# Altium PCB CALTRANS Signal Interface.PcbDoc
Units mil, origin at the board's own origin, x right, y up, seen from the top; angles counter-clockwise.
Board outline 2130 x 2405 mil, 4 copper layers (Components, GND, PWR, Signals), stack 23.756 mil thick; 39 components, 34 nets, 163 pads, 71 vias.
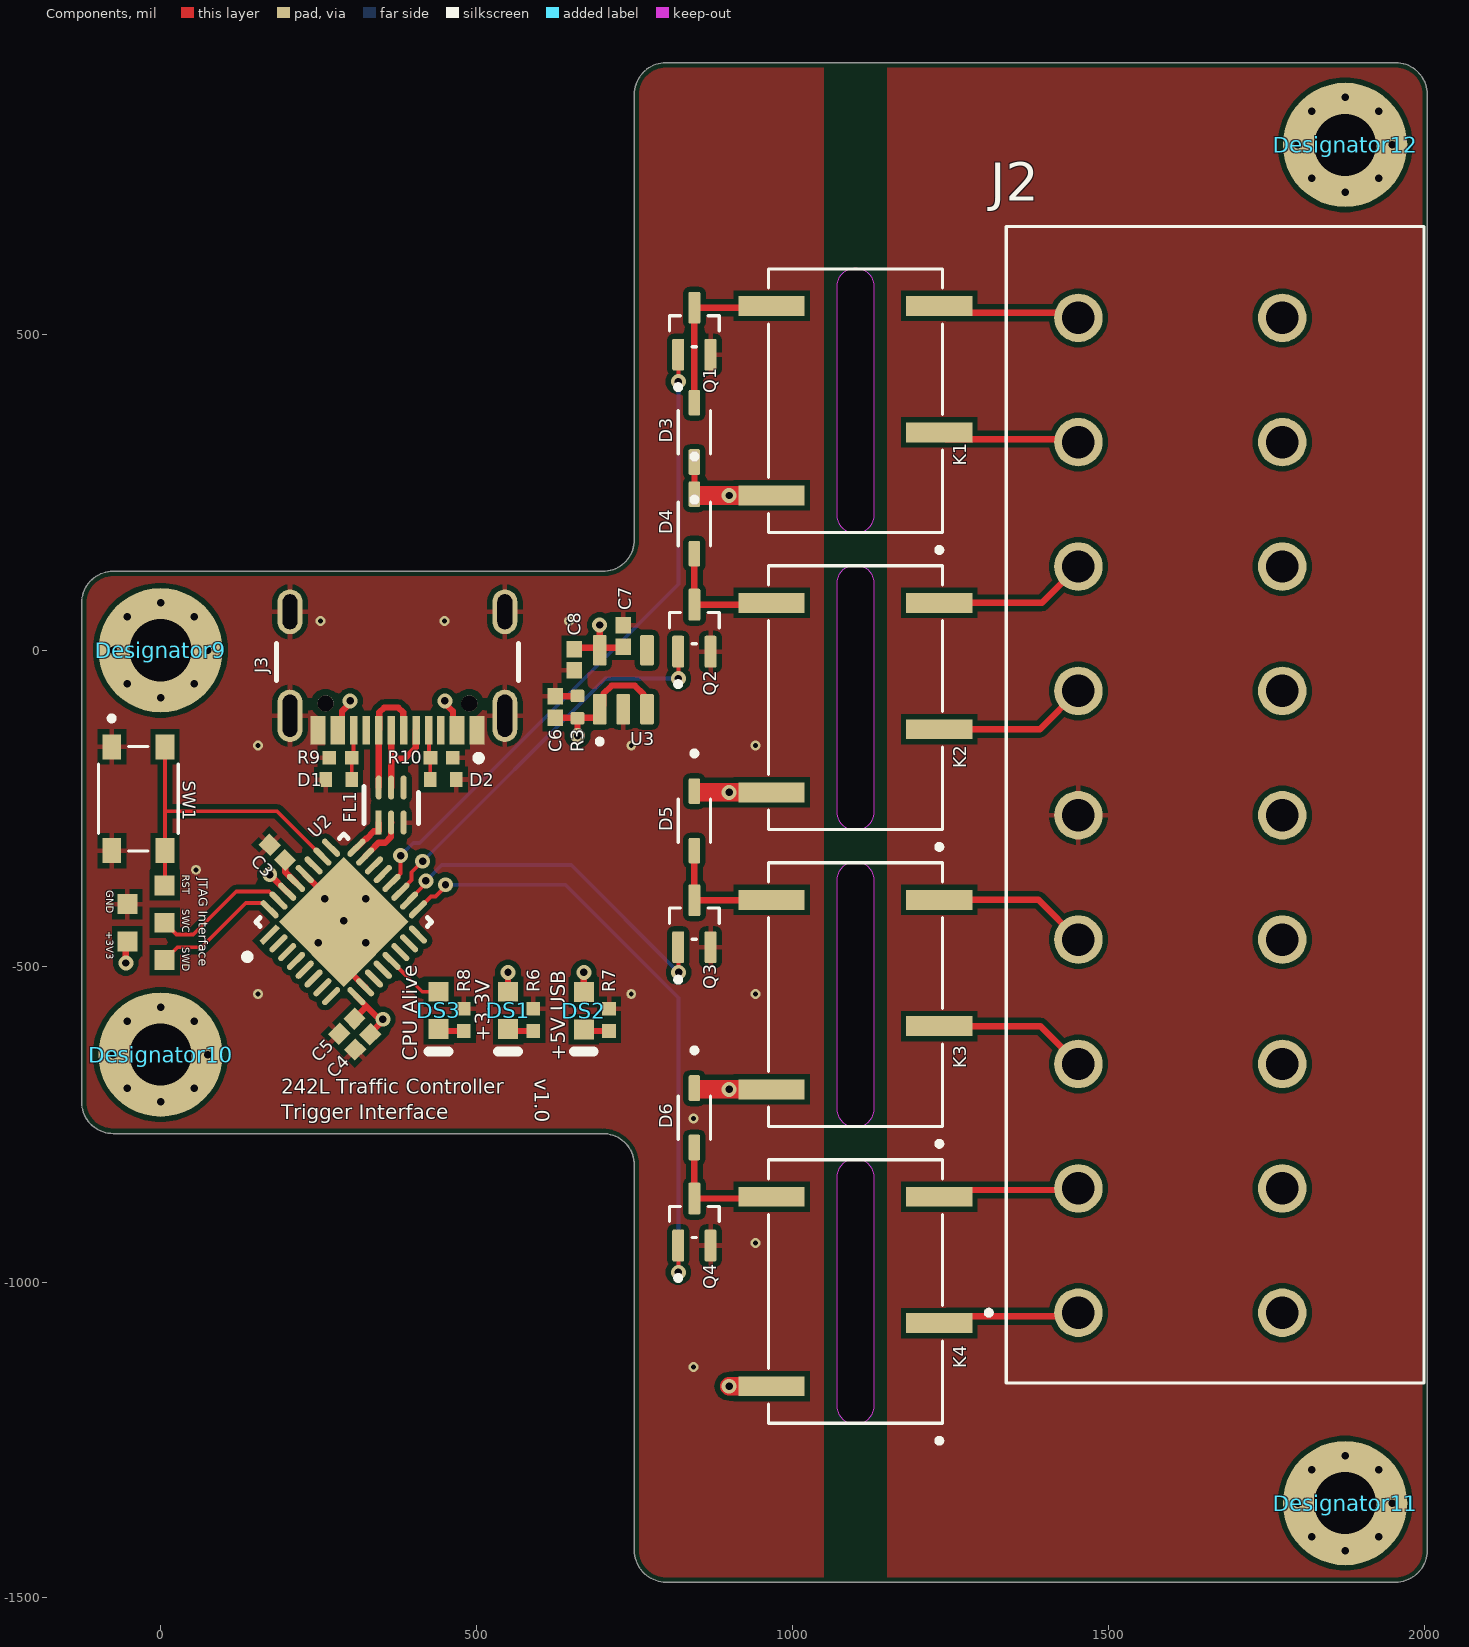
[diagram p0: Components view]
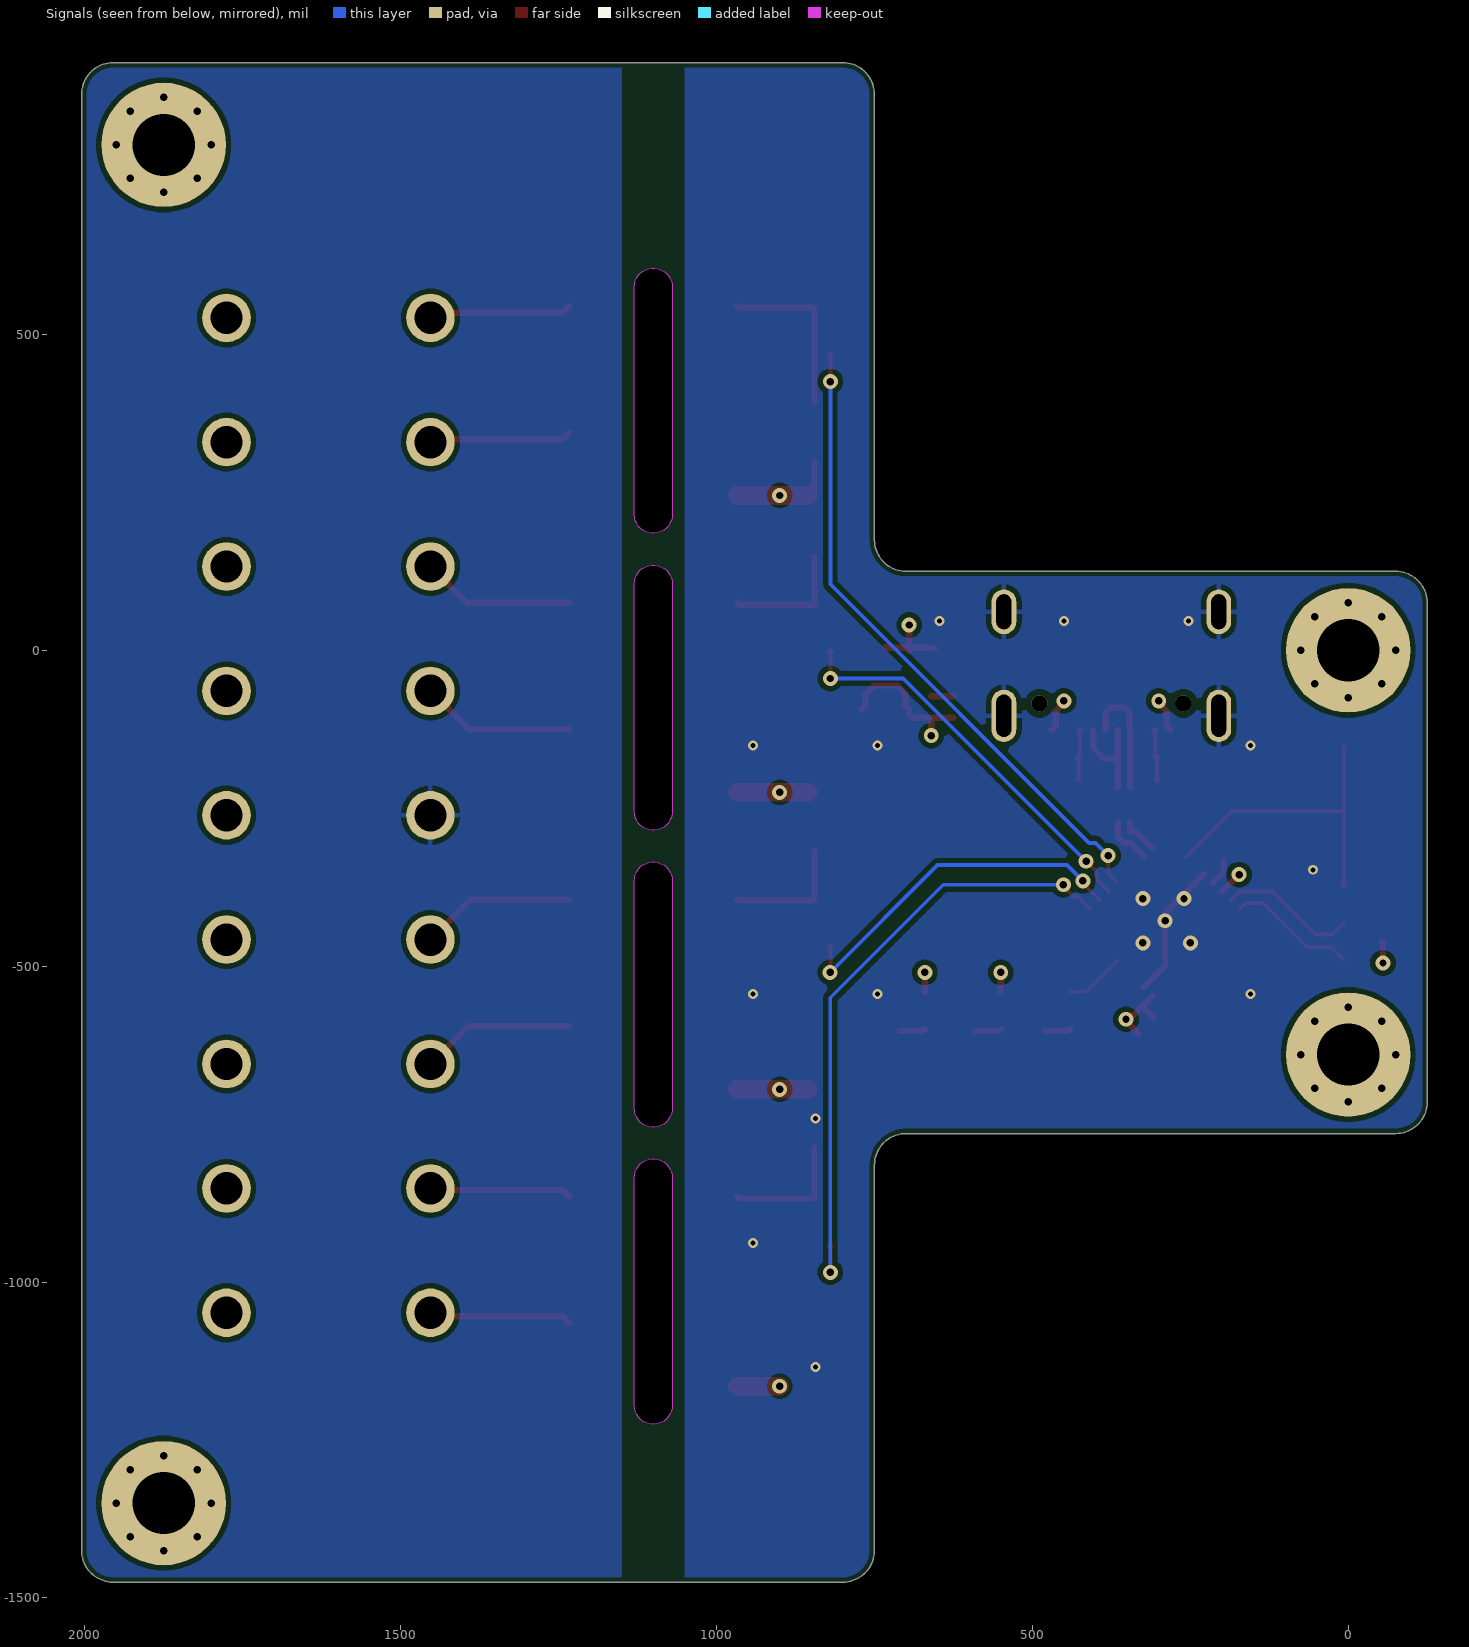
[diagram p1: Signals view, seen from below]
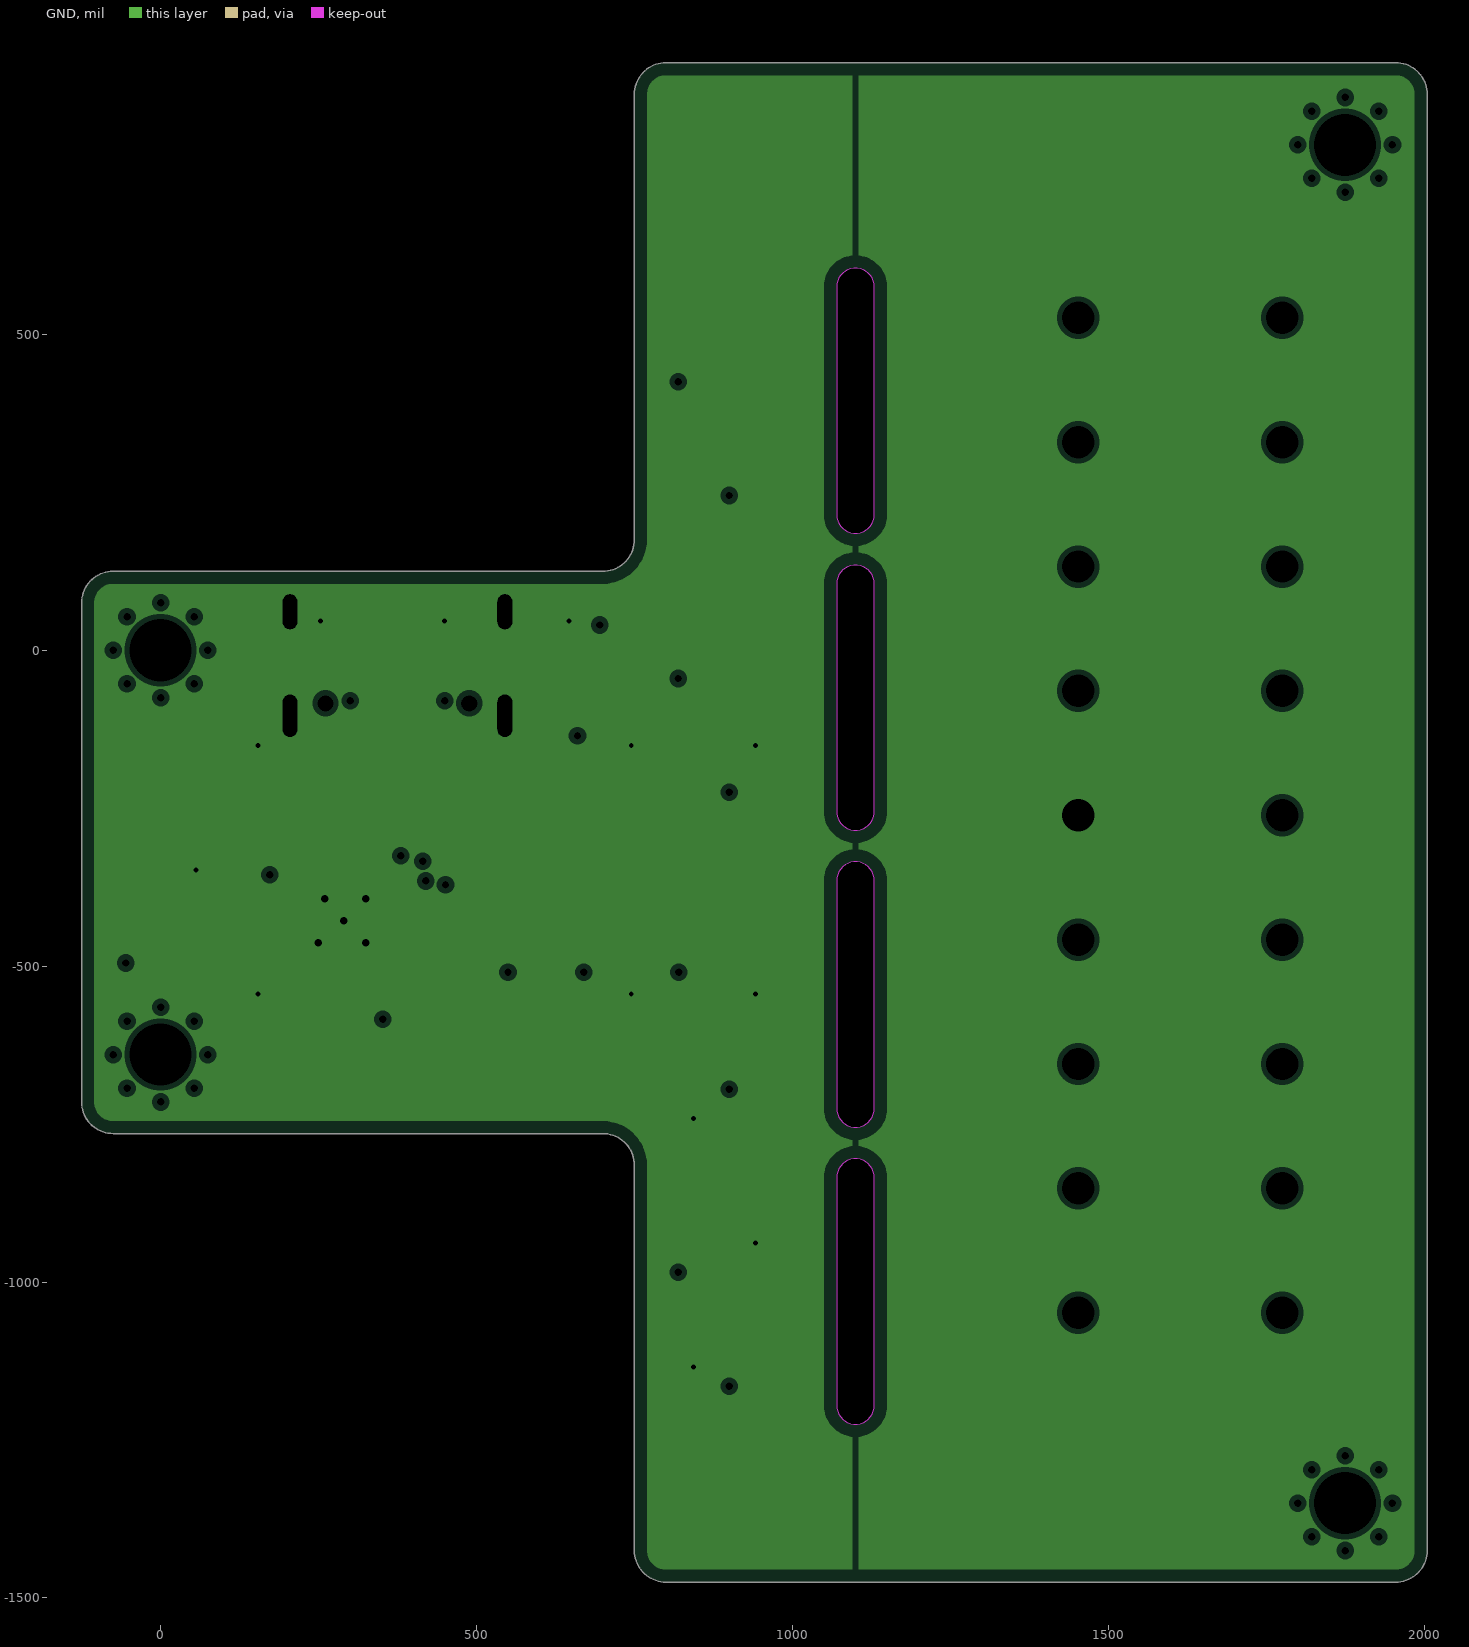
[diagram p2: GND, clearances drawn from the general rule]
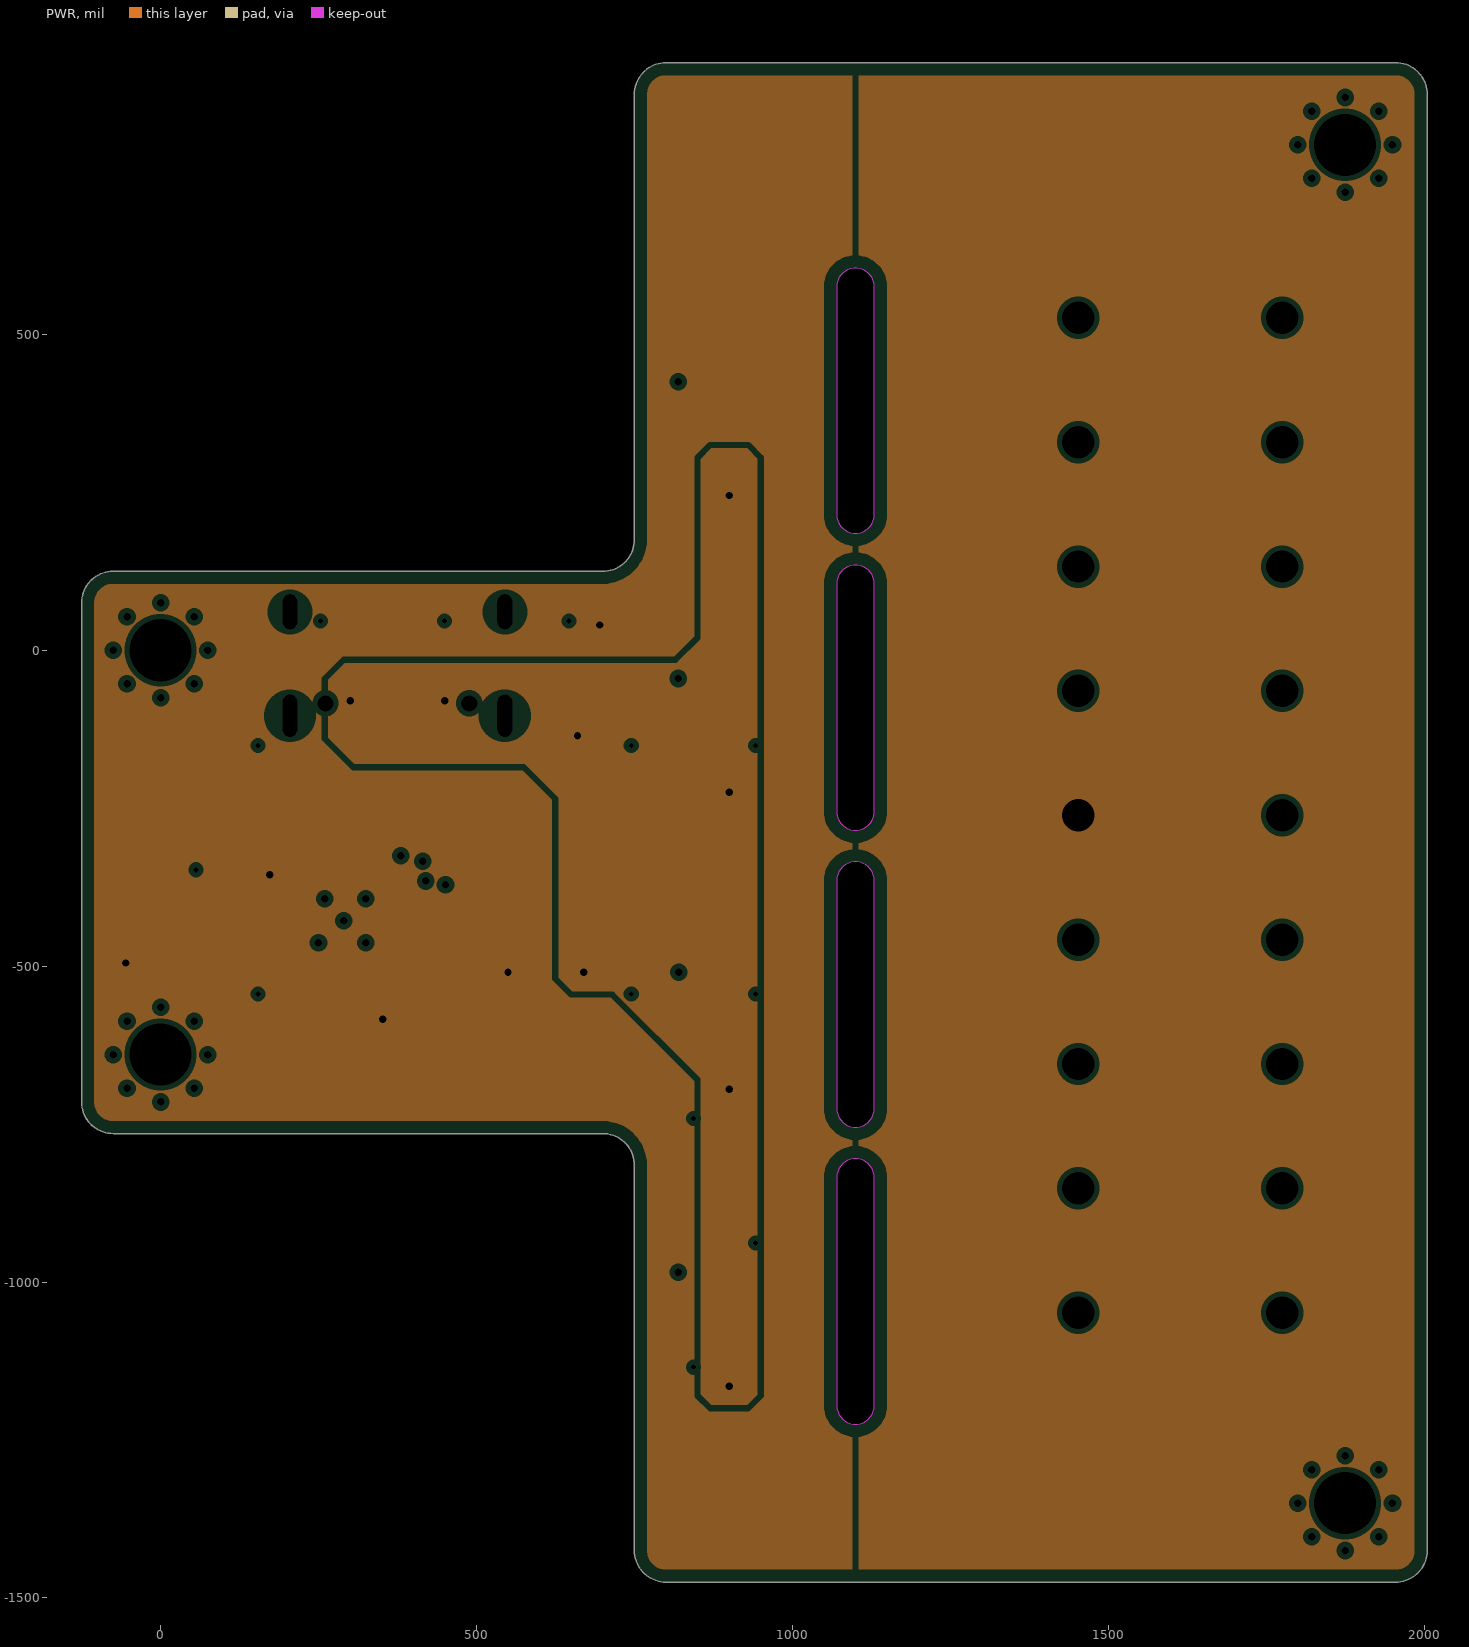
[diagram p3: PWR, clearances drawn from the general rule]
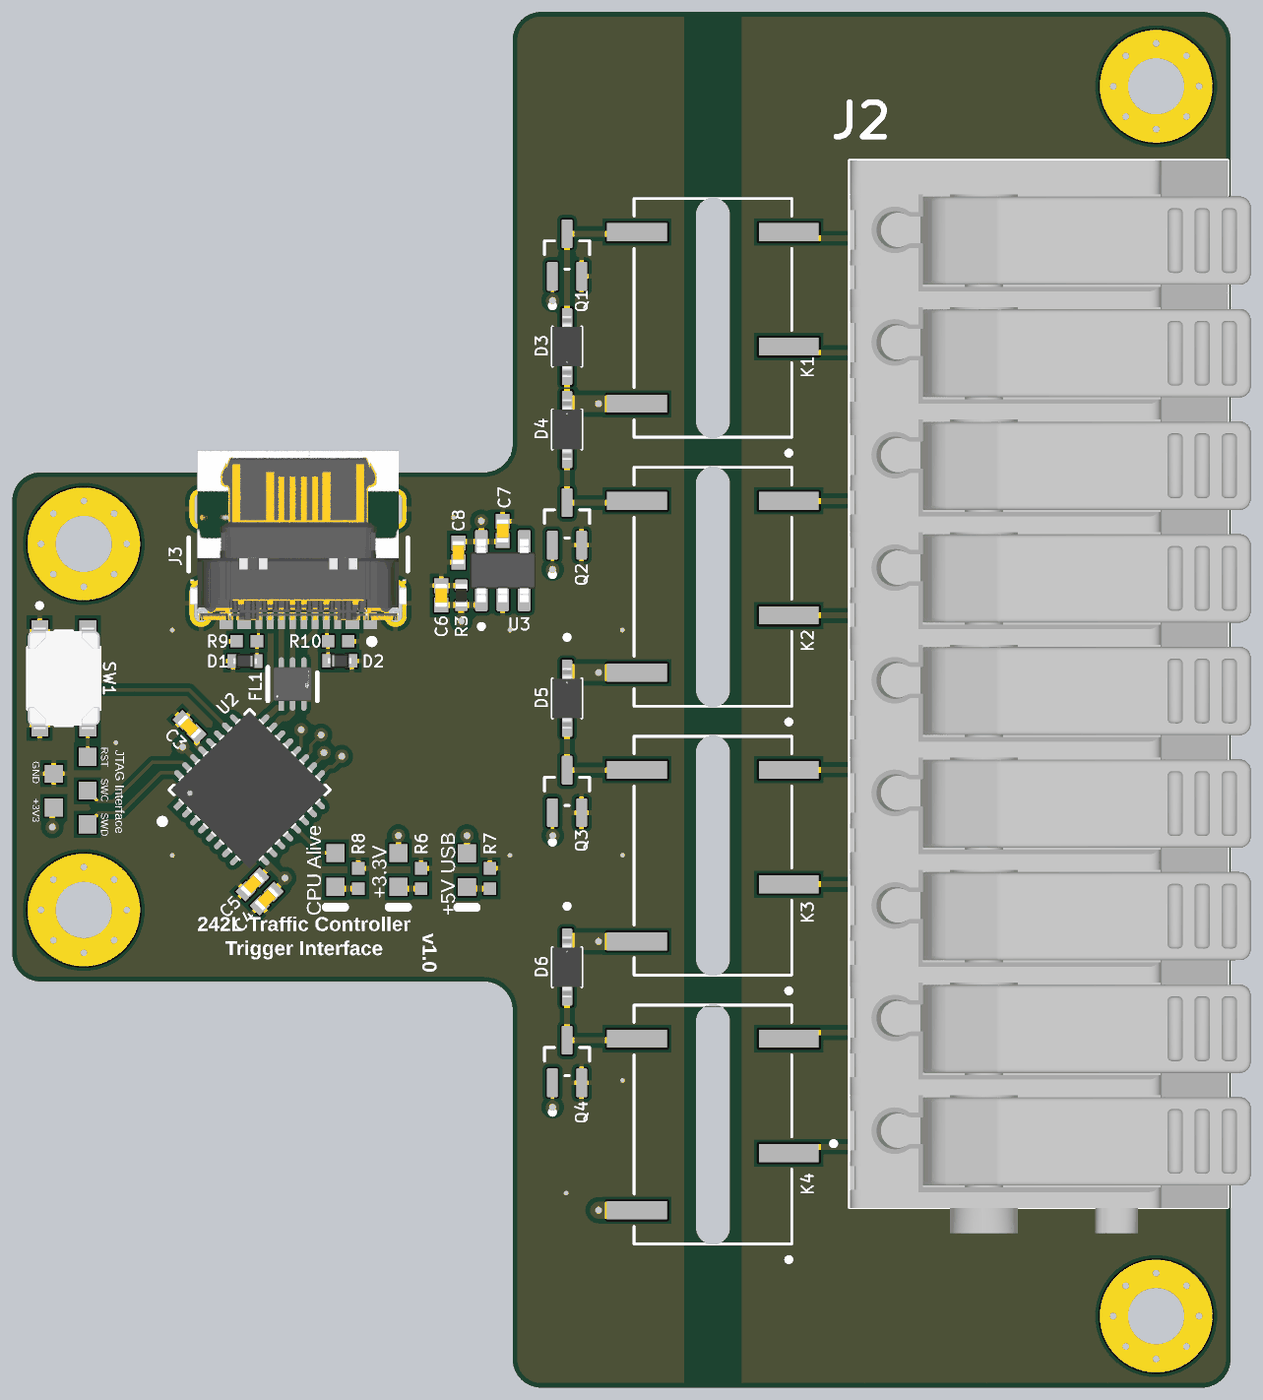
[diagram p4: 3D render of the assembled board from above, using the file's embedded part models]

## Layer stack, top to bottom
Top Solder: solder mask 0.4, Solder Resist, Dk 3.5
Components: signal copper 1.4
Dielectric 2: prepreg 2.8, PP-006, Dk 4.1
GND: plane copper 1.378, net (Multiple Nets)
Dielectric 1: dielectric 12.6, FR-4, Dk 4.8
PWR: plane copper 1.378, net (Multiple Nets)
Dielectric 3: prepreg 2.8, PP-006, Dk 4.1
Signals: signal copper 1.4
Bottom Solder: solder mask 0.4, Solder Resist, Dk 3.5

## Board outline
-75,-765 700,-765 cw(c700,-815) 750,-815 750,-1425 ccw(c800,-1425) 800,-1475 1955,-1475 ccw(c1955,-1425) 2005,-1425 2005,880 ccw(c1955,880) 1955,930 800,930 ccw(c800,880) 750,880 750,175 cw(c700,175) 700,125 -75,125 ccw(c-75,75) -125,75 -125,-715 ccw(c-75,-715)
cut-out: 1070,-1195 ccw(c1100,-1195) 1130,-1195 1130,-835 ccw(c1100,-835) 1070,-835
cut-out: 1070,-725 ccw(c1100,-725) 1130,-725 1130,-365 ccw(c1100,-365) 1070,-365
cut-out: 1070,-255 ccw(c1100,-255) 1130,-255 1130,105 ccw(c1100,105) 1070,105
cut-out: 1070,215 ccw(c1100,215) 1130,215 1130,575 ccw(c1100,575) 1070,575

## Design rules (kind name [scope] priority, off if disabled: settings)
BoardOutlineClearance [All] p1: gap=7.87 ignorepadtopadclearanceinfootprint=FALSE
Clearance [All] p1: gap=8 ignorepadtopadclearanceinfootprint=FALSE except(9.84: Arc-Hole Track-Hole SMDPad-Hole THPad-Hole Via-Hole Fill-Hole Poly-Hole Region-Hole Text-Hole)
ComponentClearance [All] p1: gap=5 collisioncheckmode=3 verticalgap=5 showdistances=TRUE
DiffPairsRouting [All] p1: maxlimit=15 minlimit=8 mostfreqgap=8 toplayer_minwidth=8 toplayer_maxwidth=1000 toplayer_prefwidth=8 bottomlayer_minwidth=8 bottomlayer_maxwidth=1000 bottomlayer_prefwidth=8 maxuncoupledlength=500
Height [All] p1: minheight=0 maxheight=71497.94 prefheight=500
HoleSize [All] p1: absolutevalues=TRUE maxlimit=248.03 minlimit=11.81 maxpercent=80.000 minpercent=20.000
HoleToHoleClearance [All] p1: gap=9.84 allowstackedmicrovias=FALSE
MinimumAnnularRing [All] p1: minimumring=3
MinimumSolderMaskSliver [All] p1: minsoldermaskwidth=0
PlaneClearance [All] p1: clearance=8
PlaneConnect PlaneConnectPowerPads [InPadClass('PowerPads')] p1: planeconnectstyle=Direct reliefexpansion=20 reliefentries=4 reliefconductorwidth=10 reliefairgap=10
PlaneConnect [All] p2: pad.planeconnectstyle=Relief pad.reliefexpansion=11.81 pad.reliefentries=4 pad.reliefconductorwidth=8 pad.reliefairgap=8 via.planeconnectstyle=Direct via.reliefexpansion=11.81 via.reliefentries=4 via.reliefconductorwidth=5 via.reliefairgap=5
PolygonConnect PolygonConnectPowerPads [All vs (InPadClass('PowerPads'))] p1: connectstyle=Direct reliefconductorwidth=10 reliefentries=4 polygonreliefangle="90 Angle" airgapwidth=10
PolygonConnect [All] p2: thpad.connectstyle=Relief thpad.reliefconductorwidth=8 thpad.reliefentries=4 thpad.polygonreliefangle="90 Angle" thpad.airgapwidth=8 smdpad.connectstyle=Relief smdpad.reliefconductorwidth=8 smdpad.reliefentries=4 smdpad.polygonreliefangle="90 Angle" smdpad.airgapwidth=8 via.connectstyle=Direct via.reliefconductorwidth=5 via.reliefentries=4 via.polygonreliefangle="90 Angle" via.airgapwidth=5
RoutingVias [All] p1: holewidth=11.81 width=23.62 viastyle="Through Hole" minholewidth=11.81 minwidth=23.62 maxholewidth=23.62 maxwidth=259.84
SilkToSilkClearance [All] p1: silktosilkclearance=0
SilkToSolderMaskClearance [IsPad] p1: minsilkscreentomaskgap=5 clearancetoexposedcopper=TRUE
SolderMaskExpansion [All] p1: expansion=2.95 istentingtop=FALSE
SupplyNets "Schematic Supply Nets_6" [InNet('SIG_GND')] p1: voltage=0.000
SupplyNets "Schematic Supply Nets_4" [InNet('3V3')] p2: voltage=0.000
SupplyNets "Schematic Supply Nets_2" [InNet('GND')] p3: voltage=0.000
SupplyNets "Schematic Supply Nets" [InNet('5V0_USB')] p4: voltage=0.000
Width [All] p1: maxlimit=1000 minlimit=8 preferedwidth=8 minimp=50.000000 maximp=50.000000 favimp=50.000000
20 further rules are at their usual default settings.

## Classes and differential pairs
component class "USB and LEDs": D1 D2 DS1 DS2 DS3 FL1 J2 J3 R6 R7 R8 R9 R10
component class Control: C3 C4 C5 C6 C7 C8 D3 D4 D5 D6 K1 K2 K3 K4 Q1 Q2 Q3 Q4 R3 SW1 U2 U3
differential pair USB_D: +USB_D_P -USB_D_N

## Components (designator, comment, footprint, x,y, rotation, side; value= is the part's Value field where it differs from the comment)
C3 "GRM155Z71A105KE01D" CAPC1005X55X30NL05T10 185,-320 r135 top value=1µF
C4 "04025C104KAT4A" CAPC1005X55X30NL05T10 320,-620 r225 top value=100nF
C5 "04025C104KAT4A" CAPC1005X55X30NL05T10 295,-595 r225 top value=100nF
C6 "GRM155Z71A105KE01D" CAPC1005X55X30NL05T10 625,-90 r90 top value=1µF
C7 "GRM155Z71A105KE01D" CAPC1005X55X30NL05T10 732.35,22.64 r90 top value=1µF
C8 "GRM155R61A106ME11J" CAPC1005X55X30NL05T10 655,-15 r270 top value=10uF
D1 "CPDQ5V0" MBTB-D-SOD-923F-IMP-0402 281.95,-204.87 r180 top
D2 "CPDQ5V0" MBTB-D-SOD-923F-IMP-0402 447.54,-204.57 r0 top
D3 "1SS367" SOD2513X114N 845,345 r90 top
D4 "1SS367" SOD2513X114N 845,200 r270 top
D5 "1SS367" SOD2513X114N 845,-270 r270 top
D6 "1SS367" SOD2513X114N 845,-740 r270 top
Designator9 "Comment" "Copy of PTH-M2D5X5" 0,0 r0 top
Designator10 "Comment" "Copy of PTH-M2D5X5" 0,-640 r0 top
Designator11 "Comment" "Copy of PTH-M2D5X5" 1875,-1350 r0 top
Designator12 "Comment" "Copy of PTH-M2D5X5" 1875,800 r0 top
DS1 "LTST-C190GKT" LTST-C190GKT_V 550,-570 r270 top
DS2 "LTST-C190GKT" LTST-C190GKT_V 670,-570.47 r270 top
DS3 "LTST-C190GKT" LTST-C190GKT_V 440,-570 r270 top
FL1 "ECMF02-2AMX6" FP-QFN-6L-IPC_A 365,-245 r90 top
J2 "1190305" PHOENIX_1190305 2000,-1160 r90 top locked
J3 "USB4105-GF-A" FP-USB4105-GF-A-MFG 375,15 r180 top
K1 "G6L-1F-DC5" RELAY_G6L-1F-DC5 1100,395 r90 top locked
K2 "G6L-1F-DC5" RELAY_G6L-1F-DC5 1100,-75 r90 top locked
K3 "G6L-1F-DC5" RELAY_G6L-1F-DC5 1100,-545 r90 top locked
K4 "G6L-1F-DC5" RELAY_G6L-1F-DC5 1100,-1015 r90 top locked
Q1 "2SK3018-TP" 2SK3018-TP-Footprint-1 845,505 r90 top
Q2 "2SK3018-TP" 2SK3018-TP-Footprint-1 845,35 r90 top
Q3 "2SK3018-TP" 2SK3018-TP-Footprint-1 845,-432.8 r90 top
Q4 "2SK3018-TP" 2SK3018-TP-Footprint-1 845,-905 r90 top
R3 "100KR2F" RESC0402(1005)_L 660,-90 r90 top value=100k
R6 "CRCW040259R0FKED" RESC1005X40X25NL05T05 590,-585 r90 top value=220
R7 "ERJ-2RKF1430X" RESC1005X40X25NL05T05 710,-585 r90 top value=220
R8 "CRCW040259R0FKED" RESC1005X40X25NL05T05 480,-585 r90 top value=220
R9 "MCS04020C5101FE000" RESC1005X40X25NL05T05 285,-170 r180 top value=5.1k
R10 "MCS04020C5101FE000" RESC1005X40X25NL05T05 445,-170 r0 top value=5.1k
SW1 "TL3365AF180QG" SW_TL3365AF180QG -35,-235 r270 top
U2 "ATSAMD21E18A-MU" FP-PG-IPC_A 290,-430 r45 top
U3 "NCP718BSN330T1G" SOT95P280X100-5N 732.6,-46.65 r90 top

## Footprints (in the part's own frame and the unit in brackets; to place one, negate y for a bottom-side part, rotate by r counter-clockwise, add the part's x,y. Pads: shape width x height; smd on the part's side, far side on the other; paste and mask are expansions set on the pad)
2SK3018-TP-Footprint-1 [mm]
  rrect25% 1.28x0.48 smd: 1(-0.945,0.65) 2(-0.945,-0.65) 3(0.945,0)
  silkscreen extent -2.35,-1 0.63,1
CAPC1005X55X30NL05T10 [mm] "Chip Capacitor, 2-Leads, Body 1.05x0.55mm, IPC Medium Density"
  rect 0.66x0.62 smd: 1(-0.43,0) 2(0.43,0)
  body extent -0.53,-0.28 0.53,0.28, height 0.55
"Copy of PTH-M2D5X5" [mm]
  round 5 hole 2.5: 1(0,0)
FP-PG-IPC_A [mm]
  rect 0.935x0.239 smd paste+0 mask+0: 1(-2.468,1.75)
  rrect100% 0.935x0.239 smd paste+0 mask+0: 2(-2.468,1.25) 3(-2.468,0.75) 4(-2.468,0.25) 5(-2.468,-0.25) 6(-2.468,-0.75) 7(-2.468,-1.25) 8(-2.468,-1.75) 17(2.468,-1.75) 18(2.468,-1.25) 19(2.468,-0.75) 20(2.468,-0.25) 21(2.468,0.25) 22(2.468,0.75) 23(2.468,1.25) 24(2.468,1.75)
  rrect100% 0.239x0.935 smd paste+0 mask+0: 9(-1.75,-2.468) 10(-1.25,-2.468) 11(-0.75,-2.468) 12(-0.25,-2.468) 13(0.25,-2.468) 14(0.75,-2.468) 15(1.25,-2.468) 16(1.75,-2.468) 25(1.75,2.468) 26(1.25,2.468) 27(0.75,2.468) 28(0.25,2.468) 29(-0.25,2.468) 30(-0.75,2.468) 31(-1.25,2.468) 32(-1.75,2.468)
  rect 3.7x3.7 smd paste-1000 mask+0: 33(0,0)
  silkscreen extent -3.86,-2.5 2.5,2.5, body extent -2.55,-2.55 2.55,2.55, height 1.65
FP-QFN-6L-IPC_A [mm]
  rect 0.965x0.239 smd paste+0 mask+0: 1(-0.704,0.5)
  rrect100% 0.965x0.239 smd paste+0 mask+0: 2(-0.704,0) 3(-0.704,-0.5) 4(0.704,-0.5) 5(0.704,0) 6(0.704,0.5)
  silkscreen extent -0.75,-1.1 0.75,1.1, body extent -1.69,-1.35 1.69,1.35, height 0.25
FP-USB4105-GF-A-MFG [mm]
  rrect100% 1x2.1 hole 1.7 slot 0.6 at 0 deg paste-2539.97 mask+0: 1(-4.32,3.015) 2(4.32,3.015)
  rrect100% 1x1.8 hole 1.4 slot 0.6 at 0 deg paste-2539.97 mask+0: 3(-4.32,-1.165) 4(4.32,-1.165)
  rect 0.6x1.15 smd paste+0 mask+0: A1-B12(-3.2,3.59) A4-B9(-2.4,3.59) B1-A12(3.2,3.59) B4-A9(2.4,3.59)
  rect 0.3x1.15 smd paste+0 mask+0: A5(-1.25,3.59) A6(-0.25,3.59) A7(0.25,3.59) A8(1.25,3.59) B5(1.75,3.59) B6(0.75,3.59) B7(-0.75,3.59) B8(-1.75,3.59)
  round 0.65 hole 0.65 unplated paste-2539.97 mask+0: ""(-2.89,2.515) ""(2.89,2.515)
  silkscreen extent -4.86,0.11 4.86,4.84, body extent -4.96,-3.94 4.96,4.27, height 0.25
LTST-C190GKT_V [mm] "SMD, 2-Leads, Body 1.6x0.8mm"
  rect 0.8x0.8 smd: 1(-0.75,0) 2(0.75,0)
  silkscreen extent 1.65,-0.4 1.65,0.4, body extent -0.8,-0.4 0.8,0.4, height 0.9
MBTB-D-SOD-923F-IMP-0402 [mm]
  rect 0.5x0.6 smd: 1(-0.525,0) 2(0.525,0)
  body extent -0.52,-0.33 0.52,0.33, height 0.82
PHOENIX_1190305 [mm]
  round 1.95 hole 1.3: 1A(2.83,13.9) 1B(2.83,5.7) 2A(7.83,13.9) 2B(7.83,5.7) 3A(12.83,13.9) 3B(12.83,5.7) 4A(17.83,13.9) 4B(17.83,5.7) 5A(22.83,13.9) 5B(22.83,5.7) 6A(27.83,13.9) 6B(27.83,5.7) 7A(32.83,13.9) 7B(32.83,5.7) 8A(37.83,13.9) 8B(37.83,5.7) 9A(42.83,13.9) 9B(42.83,5.7)
  silkscreen extent 0,0 46.5,17.6, body extent -1.15,-1.03 46.48,16.77, height 16.64
RELAY_G6L-1F-DC5 [mm]
  rect 0.8x2.66 smd paste+0 mask+0.102: 2(-1.27,-3.37) 4(3.81,-3.37) 5(3.81,3.37) 8(-3.81,3.37)
  silkscreen extent -6.1,-3.5 5.3,3.5
RESC0402(1005)_L [mm] "Chip Resistor, Body 1.0x0.5mm, IPC High Density"
  rrect25% 0.5x0.55 smd: 1(-0.45,0) 2(0.45,0)
  body extent -0.5,-0.25 0.5,0.25, height 0.3
RESC1005X40X25NL05T05 [mm] "Chip Resistor, 2-Leads, Body 1.00x0.50mm, IPC Medium Density"
  rect 0.55x0.55 smd: 1(-0.45,0) 2(0.45,0)
  body extent -0.53,-0.27 0.53,0.28, height 0.4
SOD2513X114N [mm]
  rrect25% 1.03x0.46 smd paste+0 mask+0.102: 1(-1.195,0) 2(1.195,0)
  silkscreen extent -2.81,-0.65 0.87,0.65, body extent -1.35,-0.65 1.35,0.65, height 1.1
SOT95P280X100-5N [mm]
  rrect25% 1.24x0.55 smd: 1(-1.185,0.95) 2(-1.185,0) 3(-1.185,-0.95) 4(1.185,-0.95) 5(1.185,0.95)
  silkscreen extent -2.58,0.85 -2.39,1.05, body extent -1.4,-1.45 1.4,1.45, height 0.98
SW_TL3365AF180QG [mil]
  rect 39.37x29.53 smd: 1(-82,-42) 2(82,-42) 3(-82,42) 4(82,42)
  silkscreen extent -131,-63 83,63, body extent -89,-63 89,63, height 98

## Part data
C3 C6 C7: library part CMP-001-00092-1, "Ceramic Capacitor, Multilayer, Ceramic, 10V, 10% +Tol, 10% -Tol, X7R, 15% TC, 1uF, Surface Mount, 0402", Capacitor Type=X7R, Case/Package=0402, Max Operating Temperature=125°C, Min Operating Temperature=-55°C, Tolerance=10%, Voltage Rating=10V, Mounting Technology="Surface Mount", Pins=2, RoHS Compliant=Yes
C4 C5: library part CMP-001-00090-1, "Ceramic Capacitor, Multilayer, Ceramic, 50V, 10% +Tol, 10% -Tol, X7R, 15% TC, 0.1uF, Surface Mount, 0402", Capacitor Type=X7R, Case/Package=0402, Tolerance=10%, Voltage Rating=50V, Pins=2, RoHS Compliant=Yes
C8: library part CMP-001-00091-1, "Ceramic Capacitor, Multilayer, Ceramic, 10V, 20% +Tol, 20% -Tol, X5R, 15% TC, 10uF, Surface Mount, 0402", Capacitor Type=X5R, Case/Package=0402, Tolerance=20%, Voltage Rating=10V
D1 D2: library part CMP-004-00042-2, "18.6V Clamp 9.4A (8/20Âµs) Ipp Tvs Diode Surface Mount 0402/SOD-923F", Case/Package="0402 Comchip", Availability=Good, Check_prices=https://www.snapeda.com/parts/CPDQ5V0-HF/Comchip%20Technology/view-part/809934/?ref=eda, Component Type=Standard, Design Item ID=CPDQ5V0-HF, MF="Comchip Technology", MP=CPDQ5V0-HF, Pins=2, Price=None, Purchase-URL=https://pricing.snapeda.com/search/part/CPDQ5V0-HF/?ref=eda, SnapEDA_Link=https://www.snapeda.com/parts/CPDQ5V0-HF/Comchip%20Technology/view-part/809934/?ref=snap, Source=CPDQ5V0-HF.SchLib
D3 D4 D5 D6: library part CMP-004-00052-1, "Diode Schottky 10V 100mA USC", Forward Voltage=500mV, Max Operating Temperature=100°C, Min Operating Temperature=-40°C
DS1 DS2 DS3: library part CMP-007-00022-2, "LED Uni-Color Green, 100 mW, 30 mA, -55 to 85 degC, 2-Pin SMD, RoHS, Tape and Reel", Case/Package=0603, Colour=Green, Forward Current=20mA, Forward Voltage=2.1V, Manufacturer=Lite-On, Max Operating Temperature=85°C, Min Operating Temperature=-55°C, Package Description="2-Pin Surface Mount Device, Body 1.6 x 0.8 mm", Package Quantity=3000, Package Reference=C190GKT, Power=100mW, Datasheet URL=http://datasheet.octopart.com/LTST-C190GKT-Lite-On-datasheet-158530.pdf, Datasheet Version=Dec-06, Illumination Colour=Green, Lens Style=Clear, Luminous Intensity=6mcd, Manufacturer URL=http://www.us.liteon.com/, Mounting Technology=SM, Nominal Vf=2.1V, Packaging=TapeandReel, Pins=2, RoHS Compliant=True, Viewing Angle=130degrees
FL1: library part CMP-00030-00005-1, "Data Line Filter, 2 Function(s), 6 Pin(s), Plastic", Max Operating Temperature=85°C, Min Operating Temperature=-40°C, Mounting Technology="Surface Mount", Pins=6, RoHS Compliant=Yes
J2: library part CMP-106-000000-2, "LPT 2,5/ 9-5,0", Package=None, Check_prices=https://www.snapeda.com/parts/1190305/Phoenix+Contact/view-part/?ref=eda, Component Type=Standard, Design Item ID=1190305, MF="Phoenix Contact", MP=1190305, Pin Count=18, SnapEDA_Link=https://www.snapeda.com/parts/1190305/Phoenix+Contact/view-part/?ref=snap, Source=1190305.SchLib
J3: library part CMP-002-00095-3, "Conn USB 2.0 Type C RCP 24 POS 0.3mm/0.5mm Solder RA SMD 24 Terminal 1 Port T/R"
K1 K2 K3 K4: library part CMP-103-000000-1, "Telecom Relay SPST-NO (1 Form A) Surface Mount", Package=None, Check_prices=https://www.snapeda.com/parts/G6L-1F-TR-DC5/Omron/view-part/?ref=eda, Component Type=Standard, Design Item ID=G6L-1F-DC5, MF="Omron Electronics", MP=G6L-1F-TR-DC5, Pin Count=4, SnapEDA_Link=https://www.snapeda.com/parts/G6L-1F-TR-DC5/Omron/view-part/?ref=snap, Source=G6L-1F-DC5.SchLib
Q1 Q2 Q3 Q4: library part CMP-013-00044-1, "Mosfet, N-Ch, 30V, 0.1A, Sot-323 Rohs Compliant: Yes"
R3: library part CMP-009-00064-2, "100K 0.063W 1% 0402 (1005 Metric)  SMD", Case/Package=0402, Power=63mW, Tolerance=1%, Mounting Technology=SMT, Pins=2
R6 R8: library part CMP-009-00207-1, "Fixed Resistor, Metal Glaze/thick Film, 0.063W, 59ohm, 50V, 1% +/-Tol, 100ppm/Cel, Surface Mount, 0402", Case/Package=0402, Max Operating Temperature=155°C, Min Operating Temperature=-55°C, Power=63mW, Tolerance=1%, Mounting Technology="Surface Mount", Pins=2, RoHS Compliant=Yes
R7: library part CMP-009-00208-1, "Fixed Resistor, Metal Glaze/thick Film, 0.1W, 143ohm, 50V, 1% +/-Tol, 100ppm/Cel, Surface Mount, 0402", Case/Package=0402, Max Operating Temperature=155°C, Min Operating Temperature=-55°C, Power=100mW, Tolerance=1%, Mounting Technology="Surface Mount", Pins=2, RoHS Compliant=Yes
R9 R10: library part CMP-009-00205-1, "Fixed Resistor, Thin Film, 0.063W, 5100ohm, 50V, 1% +/-Tol, 50ppm/Cel, Surface Mount, 0402", Case/Package=0402, Max Operating Temperature=125°C, Min Operating Temperature=-55°C, Power=63mW, Tolerance=1%, Mounting Technology="Surface Mount", Pins=2, RoHS Compliant=Yes
SW1: library part CMP-011-00019-2, "Tactile Switch SPST-NO Top Actuated Surface Mount", Case/Package=None, Availability="In Stock", Check_prices=https://www.snapeda.com/parts/TL3365AF180QG/E-Switch/view-part/?ref=eda, Component Type=Standard, Design Item ID=TL3365AF180QG, MF=E-Switch, MP=TL3365AF180QG, Pins=4, Price=None, Purchase-URL=https://pricing.snapeda.com/search/part/TL3365AF180QG/?ref=eda, SnapEDA_Link=https://www.snapeda.com/parts/TL3365AF180QG/E-Switch/view-part/?ref=snap, Source=TL3365AF180QG.SchLib
U2: library part CMP-020-00023-1, "RISC Microcontroller, 32-Bit, FLASH, CORTEX-M0 CPU, 48MHz, CMOS", Case/Package=HVQCCN, Clock Frequency=32MHz, Max Operating Temperature=85°C, Max Supply Voltage=3.63V, Min Operating Temperature=-40°C, Min Supply Voltage=1.62V, Nominal Supply Voltage=3.3V, Pins=32, RoHS Compliant=Yes
U3: library part CMP-019-00058-1, "Fixed Positive LDO Regulator, 3.3V, 440V Dropout, PDSO5", RoHS Compliant=Yes

## Free pads (board coordinates)
  rect 31.5x31.5 smd: 9(-52.54,-460.9) 9(-52.54,-401.85) 9(6.52,-490.43) 9(6.52,-431.38) 9(6.52,-372.32)

## Via types
v1: diameter 23.62/23.62 (per signal layer), hole 11.81, Components to Signals, 32 vias
v2: diameter 23.62/23.62 (per signal layer), hole 11.81, Components to Signals, tented both sides, 26 vias
v3: diameter 15.75, hole 7.87, Components to Signals, tented both sides, 13 vias

## Nets (pads, with @x,y where several pads share a name; then routed paths per layer and width w, separated by ;. In a path a pad name is that pad's centre, name@x,y a point inside that pad or via, vN(x,y) a via of type N, cw(c..) or ccw(c..) an arc to the next point about the centre after c; other vN are vias at no path point)
3V3: C4.1 C5.1 C7.1 C8.1 DS1.1 pad.9@-52.54,-460.9 U2.9 U2.30 U3.5 | length 337.3
  Components w10: v2(-55,-495) -55,-463.37 pad.9@-52.54,-460.9 ; v2(172.83,-355) 200.01,-382.18 U2.30 ; C5.1@307.53,-582.47 325,-565 ; U2.9 344.03,-581.46 349.19,-581.46 v2(351.79,-584.07) 351.79,-586.14 331.97,-605.96 C4.1 ; DS1.1 v2(550,-510) ; C8.1 656.89,3.82 U3.5@695.1,3.82 ; v2(695,40) 695.1,39.9 U3.5@695.1,3.82 ; U3.5 695.1,0.1 U3.5@695.1,3.82 ; C7.1 730.46,3.82 U3.5@695.1,3.82
5V0_USB: C6.1 D3.1 D4.1 D5.1 D6.1 DS2.1 J3.A4-B9 J3.B4-A9 K1.8 K2.8 K3.8 K4.8 R3.1 U3.1 U3.3 | length 831.6
  Components w9.84: D4.1 D3.1
  Components w10: J3.B4-A9 287.2,-119.65 287.2,-96.49 300,-83.69 v2(300,-80) ; v2(450,-80) 450,-83.69 462.8,-96.49 462.8,-119.65 J3.A4-B9 ; C6.1 R3.1@660,-106.93 ; v2(660,-135) R3.1@660,-106.93 ; DS2.1 v2(670,-510) ; U3.3@770.59,-92.72 U3.3 764.17,-87.48 764.17,-69.17 750.9,-55.9 714.1,-55.9 701.02,-68.98 701.02,-87.48 U3.1 695.2,-101.1 689.37,-106.93 R3.1@660,-106.93
  Components w29.53: 855,-695 v2(900,-695) K3.8 ; 855,-225 v2(900,-225) K2.8 ; 855,245 v2(900,245) K1.8 ; v2(900,-1165) K4.8
DBG_SWC: pad.9@6.52,-431.38 U2.31 | length 221.3
  Components w5.91: pad.9@6.52,-431.38 25.14,-450 51.94,-450 119.94,-382 171.99,-382 U2.31@186.09,-396.1
DBG_SWD: pad.9@6.52,-490.43 U2.32 | length 207.7
  Components w5.91: pad.9@6.52,-490.43 26.95,-470 65,-470 135,-400 162.56,-400 U2.32
GND: C3.2 C4.2 C5.2 C6.2 C7.2 C8.2 D1.2 D2.2 FL1.3 J3.1 J3.2 J3.3 J3.4 J3.A1-B12 J3.B1-A12 pad.9@-52.54,-401.85 Q1.2 Q2.2 Q3.2 Q4.2 R3.2 R6.2 R7.2 R8.2 R9.2 R10.2 SW1.1 SW1.2 U2.10 U2.28 U2.33 U3.2 | length 254.5
  Components w10: U2.28 290,-416.08 U2.33 290,-499.6 U2.10 U2.10@324.31,-533.5 ; C6.2 625.39,-72.68 659.61,-72.68 R3.2
  other v2: 250,-463.16 325,-463.16 290,-428.16 260,-393.16 325,-393.16
  other v3: 843.5,-1134.84 941.93,-937.99 843.5,-741.14 154.53,-544.29 745.08,-544.29 941.93,-544.29 56.1,-347.44 154.53,-150.59 745.08,-150.59 941.93,-150.59 252.95,46.26 449.8,46.26 646.65,46.26
MCU_ALIVE_H: DS3.1 U2.13 | length 94.5
  Components w5.91: U2.13 414.39,-540.47 DS3.1
NetC3_1: C3.1 U2.29 | length 43.5
  Components w10: C3.1 197.53,-332.53 197.53,-351.04 214.34,-367.85 U2.29
NetD1_1: D1.1 J3.B5 R9.1 | length 80
  Components w5.91: D1.1@302.67,-204.82 R9.1 ; R9.1@305.32,-167.39 J3.B5@305.32,-127.12
  Components w10: D1.1 D1.1@302.67,-204.82 ; R9.1 R9.1 R9.1@305.32,-167.39 ; J3.B5@305.32,-127.12 J3.B5
NetD2_1: D2.1 J3.A5 R10.1 | length 79.7
  Components w5.91: R10.1@424.99,-167.71 J3.A5@424.99,-127.12 ; D2.1@427.08,-204.36 R10.1@427.08,-170.21
  Components w10: J3.A5 J3.A5@424.99,-127.12 ; R10.1@424.99,-167.71 R10.1 R10.1@427.08,-170.21 ; D2.1 D2.1@427.08,-204.36
NetD3_2: D3.2 K1.5 Q1.3 | length 273.6
  Components w10: D3.2 Q1.3 964.53,542.2 K1.5
NetD4_2: D4.2 K2.5 Q2.3 | length 199.2
  Components w10: D4.2@845,147.95 Q2.3 964.53,72.2 K2.5
NetD5_2: D5.2 K3.5 Q3.3 | length 201.1
  Components w10: D5.2 Q3.3 966.73,-395.59 K3.5
NetD6_2: D6.2 K4.5 Q4.3 | length 204.2
  Components w10: D6.2 Q4.3 964.53,-867.8 K4.5
NetDS1_2: DS1.2 R6.1 | length 41.3
  Components w10: DS1.2 553.19,-602.72 R6.1
NetDS2_2: DS2.2 R7.1 | length 41.1
  Components w10: DS2.2 672.72,-602.72 R7.1
NetDS3_2: DS3.2 R8.1 | length 41.3
  Components w10: DS3.2 443.19,-602.72 R8.1
RST: pad.9@6.52,-372.32 SW1.3 SW1.4 U2.26 | length 498.2
  Components w5.91: pad.9@7,-371.84 SW1.4 7,-255 ; SW1.3 7,-255 ; U2.26 184.6,-255 7,-255
  Components w10: pad.9@6.52,-372.32 pad.9@7,-371.84
SIG_GND: J2.5A
SIGNAL_A: J2.8A K1.2 | length 226.6
  Components w10: K1.2 1243.43,334.25 1447.87,334.25 J2.8A
SIGNAL_A_COM: J2.9A K1.4 | length 227.9
  Components w10: K1.4 1243.43,534.25 1444.72,534.25 J2.9A
SIGNAL_B: J2.6A K2.2 | length 245.2
  Components w10: K2.2 1392.09,-125 J2.6A
SIGNAL_B_COM: J2.7A K2.4 | length 243.9
  Components w10: K2.4 1395.24,75 J2.7A
SIGNAL_C: J2.3A K3.2 | length 244.9
  Components w10: K3.2 1392.87,-595 J2.3A
SIGNAL_C_COM: J2.4A K3.4 | length 246.2
  Components w10: K3.4 1389.72,-395 J2.4A
SIGNAL_D: J2.1A K4.2 | length 226.9
  Components w10: K4.2 1243.43,-1054.25 1447.09,-1054.25 J2.1A
SIGNAL_D_COM: J2.2A K4.4 | length 225.6
  Components w10: K4.4 1243.43,-854.25 1450.24,-854.25 J2.2A
SIGNAL_TRIG_A: Q1.1 U2.20 | length 1029.8
  Components w5.91: U2.20@365.66,-367.85 365.66,-367.7 380,-353.36 v2(380,-325) ; v2(819.7,425.3) Q1.1@819.7,467.5
  Components w10: Q1.1 Q1.1@819.7,467.5
  Signals w5.91: v2(380,-325) 400,-305 410.24,-305 819.7,104.46 v2(819.7,425.3)
SIGNAL_TRIG_B: Q2.1 U2.19 | length 629.8
  Components w5.91: U2.19@379.58,-381.77 379.58,-381.23 397.24,-363.57 397.24,-351.37 414.65,-333.96 v2(414.95,-333.96) ; v2(819.7,-44.7) Q2.1@819.7,-2.5
  Components w10: Q2.1 Q2.1@819.7,-2.5
  Signals w5.91: v2(414.95,-333.96) 704.21,-44.7 v2(819.7,-44.7)
SIGNAL_TRIG_C: Q3.1 U2.18 | length 562.4
  Components w5.91: U2.18@393.91,-396.1 393.91,-394.74 420,-368.65 v2(420,-365.18) ; v2@819.7,-509.7 Q3.1@819.7,-470.3
  Components w10: Q3.1 Q3.1@819.7,-470.3
  Signals w5.91: v2(420,-365.18) 445.18,-340 650,-340 v2(820,-510)
SIGNAL_TRIG_D: Q4.1 U2.17 | length 981.4
  Components w5.91: U2.17@407.83,-410.02 428.03,-389.81 435.19,-389.81 451.04,-373.96 v2(451.04,-371.21) ; v2(819.7,-984.7) Q4.1@819.7,-942.5
  Components w10: Q4.1 Q4.1@819.7,-942.5
  Signals w5.91: v2(451.04,-371.21) 641.21,-371.21 820,-550 v2@820,-984.41
  Signals w8: v2(819.7,-984.7) v2@820,-984.41
USB_D_N: FL1.2 U2.23 | length 76.9
  Components w10: U2.23 323.9,-326.09 339.22,-310.77 339.22,-310.56 345.08,-304.7 355.41,-304.7 364.71,-295.4 364.71,-272.99 FL1.2
USB_D_N_CONN: FL1.5 J3.A7 J3.B7 | length 165.3
  Components w10: FL1.5 365.08,-217.22 365.08,-171.82 ; J3.A7 365.08,-126.42 365.08,-171.82 ; J3.B7 403.75,-127.12 403.75,-154.36 386.29,-171.82 365.08,-171.82
USB_D_P: FL1.1 U2.24 | length 59.9
  Components w10: U2.24 310.39,-312.58 324.77,-298.21 326.12,-298.21 337.62,-286.7 345.03,-286.7 345.32,-286.41 FL1.1
USB_D_P_CONN: FL1.6 J3.A6 J3.B6 | length 191.8
  Components w10: FL1.6 345.39,-217.22 345.39,-126.42 J3.B6 346.25,-125.56 346.25,-98.32 353.87,-90.7 376.45,-90.7 384.06,-98.32 384.06,-125.56 J3.A6
pads on no net: Designator9.1 Designator10.1 Designator11.1 Designator12.1 FL1.4 J2.1B J2.2B J2.3B J2.4B J2.5B J2.6B J2.7B J2.8B J2.9B J3. J3.A8 J3.B8 U2.1 U2.2 U2.3 U2.4 U2.5 U2.6 U2.7 U2.8 U2.11 U2.12 U2.14 U2.15 U2.16 U2.21 U2.22 U2.25 U2.27 U3.4
copper on no net:
  other v1: 1875,-1425 1821.97,-1403.03 1928.03,-1403.03 1800,-1350 1950,-1350 1821.97,-1296.97 1928.03,-1296.97 1875,-1275 0,-715 -53.03,-693.03 53.03,-693.03 -75,-640 75,-640 -53.03,-586.97 53.03,-586.97 0,-565 0,-75 -53.03,-53.03 53.03,-53.03 -75,0 75,0 -53.03,53.03 53.03,53.03 0,75 1875,725 1821.97,746.97 1928.03,746.97 1800,800 1950,800 1821.97,853.03 1928.03,853.03 1875,875

## Polygon pours and split planes (outlines as drawn)
GND on Signals "GND_L04_P005" (solid, remove dead copper, pour order 5): 1050,1030 1050,-1595 -125,-1595 -125,1030
SIG_GND on Signals "SIG_GND_L04_P009" (solid, pour order 9): 1150,960 1150,-1510 2025,-1510 2025,960
GND on Components "GND_L01_P001" (solid, remove dead copper, pour order 1): 1050,1025 1050,-1590 -125,-1590 -125,1025
SIG_GND on Components "SIG_GND_L01_P007" (solid, pour order 7): 1150,945 1150,-1500 2030,-1500 2030,945
3V3 on PWR (split plane): 433 vertices, not listed, extent -104.9,-1454.9 1094.9,909.9
SIG_GND on PWR (split plane): 357 vertices, not listed, extent 1105.1,-1454.9 1984.9,909.9
5V0_USB on PWR (split plane): 944.9,302.89 944.9,-1177.89 927.89,-1194.9 872.11,-1194.9 855.1,-1177.89 855.1,-680 854.71,-678.05 853.6,-676.4 718.6,-541.4 716.95,-540.29 715,-539.9 652.11,-539.9 630.1,-517.89 630.1,-235 629.71,-233.05 628.6,-231.4 578.6,-181.4 576.95,-180.29 575,-179.9 307.11,-179.9 265.1,-137.89 265.1,-55 265.1,-47.11 292.11,-20.1 815,-20.1 816.95,-19.71 818.6,-18.6 853.6,16.4 854.71,18.05 855.1,20 855.1,302.89 872.11,319.9 927.89,319.9
GND on GND (split plane): 433 vertices, not listed, extent -104.9,-1454.9 1094.9,909.9
SIG_GND on GND (split plane): 357 vertices, not listed, extent 1105.1,-1454.9 1984.9,909.9

## Other copper
GND (plane layer: these items are gaps in the copper):
  lines w10: 1100,-1475 1100,935
PWR (plane layer: these items are gaps in the copper):
  lines w10: 1100,-1485 1100,930 ; 260,-140 305,-185 575,-185 625,-235 625,-520 650,-545 715,-545 850,-680 850,-1180 870,-1200 930,-1200 950,-1180 950,305 930,325 875,325 870,325 850,305 850,20 815,-15 700,-15 290,-15 260,-45 260,-55 260,-140

## Silkscreen, mask and mechanical layers (free items; w line width, h text height)
Top Overlay:
  text "RST" at 30.21,-355 h20 r270
  text "JTAG Interface" at 55.26,-359.95 h25 r270
  text "GND" at -89.79,-380 h20 r270
  text "SWC" at 30.21,-410 h20 r270
  text "+3V3" at -89.78,-445 h20 r270
  text "SWD" at 30.21,-470 h20 r270
  text "+3.3V" at 528.82,-620 h40 r90
  text "CPU Alive" at 414.58,-650 h40 r90
  text "+5V USB" at 648.85,-650 h40 r90
  text "v1.0" at 584.44,-678.11 h40 r270
  text "242L Traffic Controller / Trigger Interface" at 191.25,-750 h40
Board Outline:
  lines w10: 750,880 cw(c800,880) 800,930 1955,930 cw(c1955,880) 2005,880 2005,560 2005,75 2005,-715 2005,-1425 cw(c1955,-1425) 1955,-1475 800,-1475 cw(c800,-1425) 750,-1425 750,-815 ccw(c700,-815) 700,-765 675,-765 -75,-765 cw(c-75,-715) -125,-715 -125,75 cw(c-75,75) -75,125 45,125 675,125 700,125 ccw(c700,175) 750,175 750,885 ; 1070,-1195 ccw(c1100,-1195) 1130,-1195 1130,-835 ccw(c1100,-835) 1070,-835 1070,-1195 ; 1070,-725 ccw(c1100,-725) 1130,-725 1130,-365 ccw(c1100,-365) 1070,-365 1070,-725 ; 1070,-255 ccw(c1100,-255) 1130,-255 1130,105 ccw(c1100,105) 1070,105 1070,-255 ; 1070,215 ccw(c1100,215) 1130,215 1130,575 ccw(c1100,575) 1070,575 1070,215